# Altium PCB flatsat_2_PCB.PcbDoc (part 6 of 6)
Units mil, origin at the board's own origin, x right, y up, seen from the top; angles counter-clockwise.
Board outline 15748.03 x 9842.52 mil, 4 copper layers (Top Layer, FlatSat GND, FlatSat VCC, Bottom Layer), stack 82.765 mil thick; 155 components, 191 nets, 1391 pads, 1634 vias.
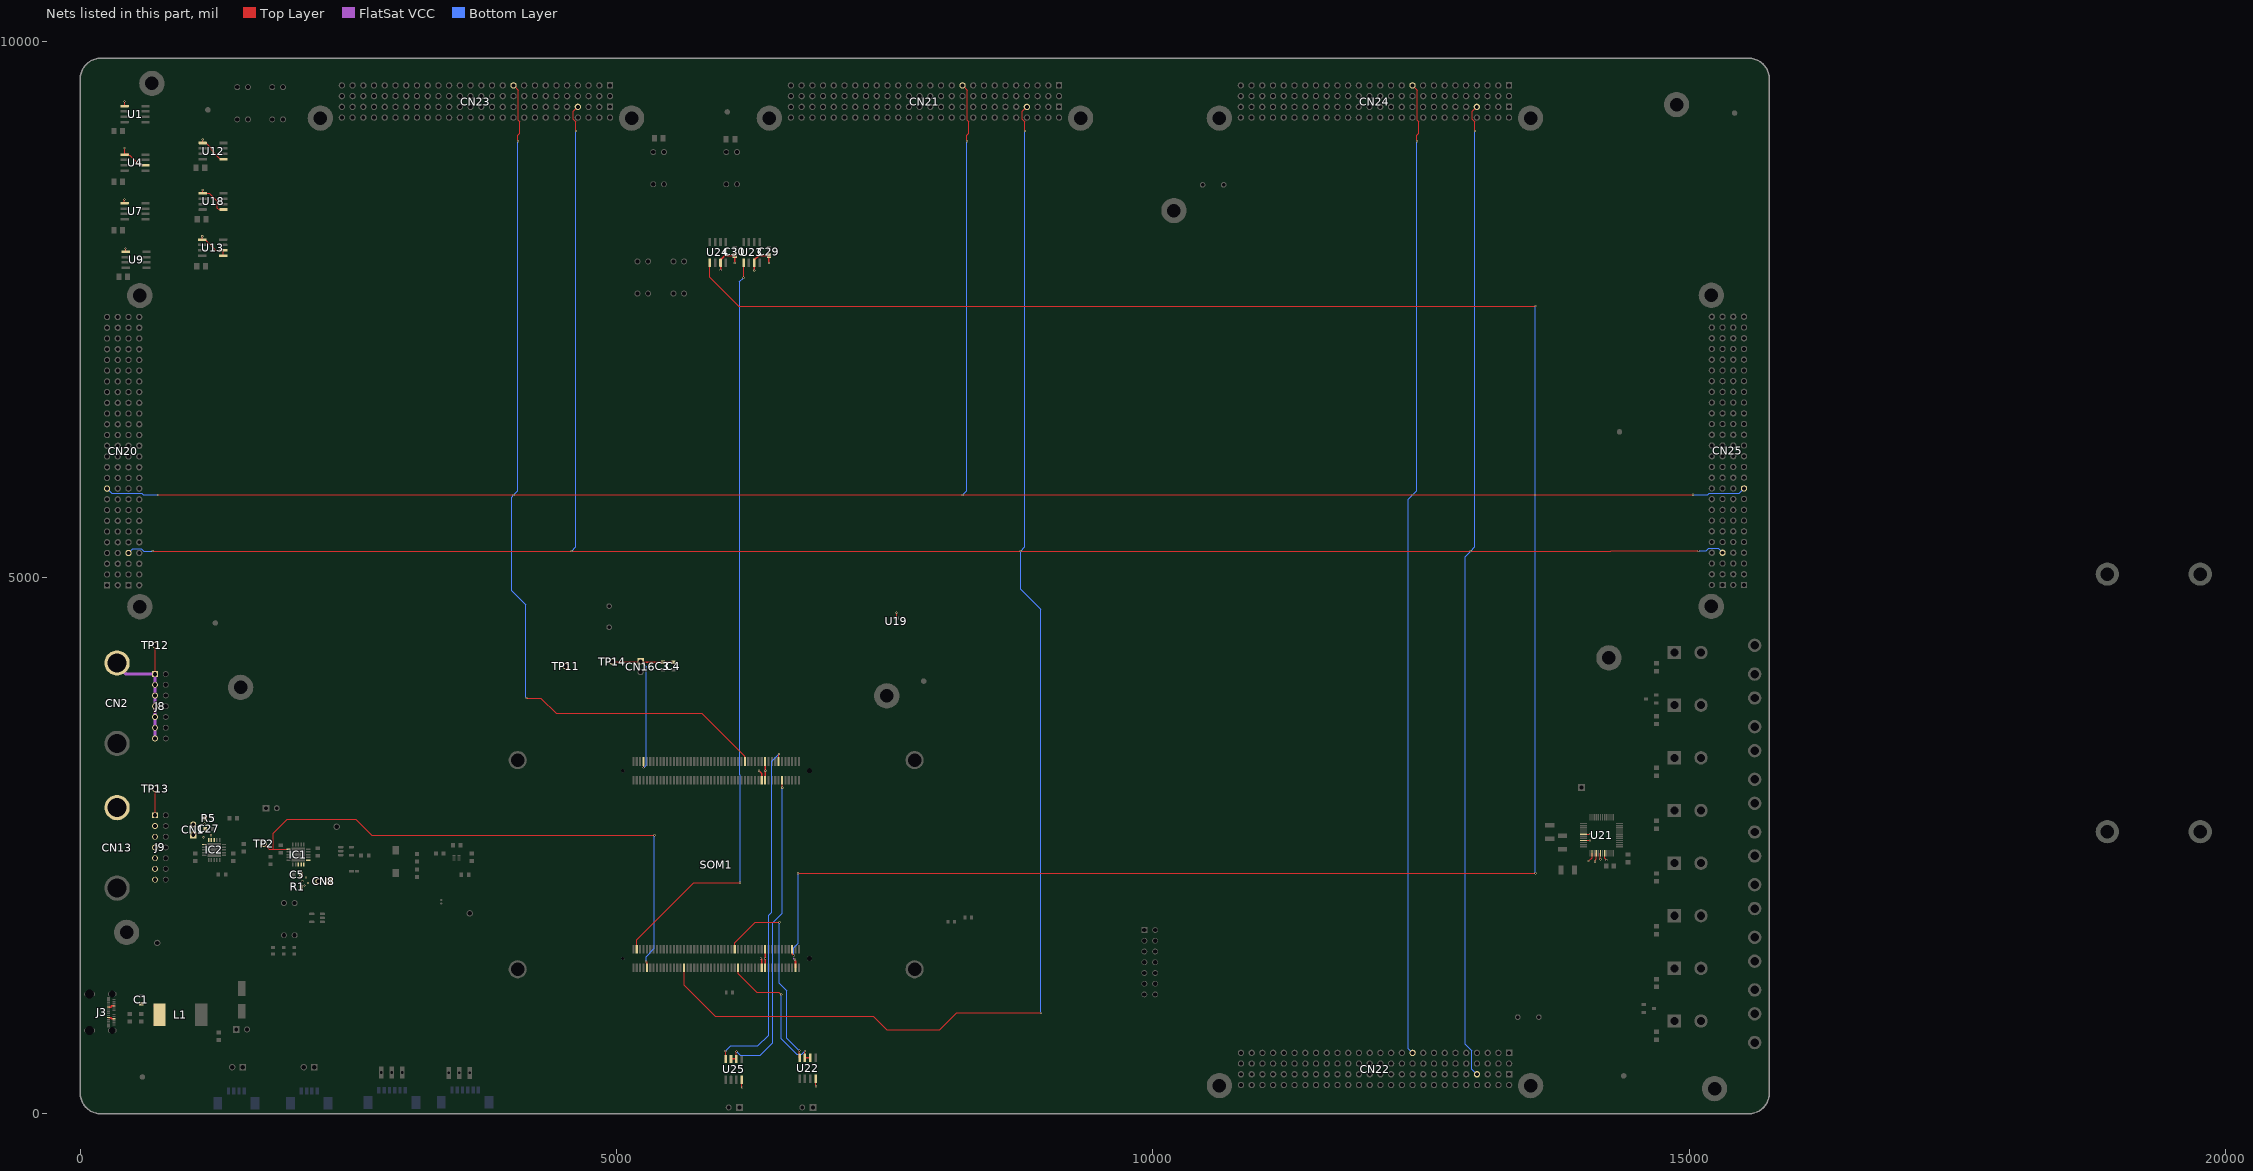
[diagram p7: the nets of this part, all layers, seen from the top]

## Via types
v1: diameter 20, hole 11.81, Top Layer to Bottom Layer, tented both sides, 872 vias
v2: diameter 30, hole 15, Top Layer to Bottom Layer, 690 vias
v3: diameter 30, hole 17.72, Top Layer to Bottom Layer, tented both sides, 72 vias

## Nets (pads, with @x,y where several pads share a name; then routed paths per layer and width w, separated by ;. In a path a pad name is that pad's centre, name@x,y a point inside that pad or via, vN(x,y) a via of type N, cw(c..) or ccw(c..) an arc to the next point about the centre after c; other vN are vias at no path point) (continued)
T/R_CHN_3: SOM1.JX2-64 U22.2 U22.3 | length 1356.4
  Top Layer w7.99: SOM1.JX2-64@6133.86,1362.2 6133.86,1307.09 6307.74,1133.21 6514.43,1133.21 v1(6535.43,1112.2)
  Top Layer w8: U22.3@6756.2,522.93 v1@6756.2,586.32
  Top Layer w15: v1(6755.91,586.61) v1@6756.2,586.32 ; U22.3@6756.2,522.93 U22.3@6756.5,522.64 U22.2@6806.5,522.64
  Bottom Layer w7.99: v1(6535.43,1112.2) 6535.43,700.79 6680.53,555.69 6724.99,555.69 v1(6755.91,586.61)
T/R_CHN_4: SOM1.JX1-90 U25.2 U25.3 | length 3002.9
  Top Layer w7.99: v1@6544.32,3042.3 SOM1.JX1-90@6544.32,3111.19
  Top Layer w8: U25.2@6117.81,513.09 v1@6117.81,582.38
  Top Layer w15: U25.3@6071.26,513.78 U25.2@6117.52,513.78 ; U25.2@6117.52,512.8 U25.2@6117.81,513.09 ; v1@6117.81,582.38 v1(6118.11,582.68) ; SOM1.JX1-90@6543.3,3112.2 SOM1.JX1-90@6544.32,3111.19 ; v1@6544.32,3042.3 v1(6545.28,3041.34)
  Bottom Layer w7.99: v1(6118.11,582.68) 6153.54,547.24 6338.58,547.24 6456.69,665.35 6456.69,1781.5 6545.28,1870.08 v1(6545.28,3041.34)
TX_CHN_1: CN20.19 CN21.19 CN22.19 CN23.19 CN24.19 CN25.19 SOM1.JX1-67 | length 36397.1
  Top Layer w8: v1(727.5,5770.61) v1(4041.9,5770.61) v1(8227.72,5770.61) v1(12422.21,5770.61) 15032.75,5770.61 v1(15034.91,5772.77) ; CN23.19@4040.16,9588.19 4083.07,9545.28 4083.07,9264.54 4098.69,9248.93 4098.69,9140.62 4081.27,9123.21 v1(4081.27,9067.1) ; v1@4159.68,3876.83 v1(4161.02,3876.83) 4296.33,3876.83 4437.08,3736.08 5793.7,3736.08 6196.85,3332.93 SOM1.JX1-67@6196.85,3285.43 ; CN21.19@8225.98,9588.19 8268.9,9545.28 8268.9,9264.54 8284.51,9248.93 8284.51,9140.62 8267.09,9123.21 v1(8267.09,9067.1) ; CN24.19@12420.47,9588.19 12463.39,9545.28 12463.39,9264.54 12479,9248.93 12479,9140.62 12461.58,9123.21 v1(12461.58,9067.1)
  Bottom Layer w8: CN20.19@251.18,5829.13 294.09,5786.22 574.83,5786.22 590.44,5770.61 v1(727.5,5770.61) ; v1(4081.27,9067.1) 4081.27,5809.98 v1(4041.9,5770.61) 4021.88,5750.58 4021.88,4875.76 4152.85,4744.78 4152.85,3885 ; v1(8227.72,5770.61) 8267.09,5809.98 v1(8267.09,9067.1) ; CN22.19@12421.59,569.42 12382.84,608.16 12382.84,1417.32 12382.84,5731.24 v1(12422.21,5770.61) 12461.58,5809.98 v1(12461.58,9067.1) ; v1(15034.91,5772.77) 15171.97,5772.77 15187.58,5788.38 15468.31,5788.38 CN25.19@15511.23,5831.3
TX_CHN_2: CN20.59 CN21.59 CN22.59 CN23.59 CN24.59 CN25.59 SOM1.JX2-32 | length 40523.9
  Top Layer w8: v1(676.59,5247.16) v1(4582.76,5247.16) v1(8768.59,5247.16) v1(12963.08,5247.16) 14267.85,5247.16 14272.68,5251.99 15075.14,5251.99 15075.51,5251.62 15083.53,5251.62 v1(15085.82,5249.32) ; v1(4622.13,9162.78) 4622.13,9247.75 4598.82,9271.07 4598.82,9346.85 CN23.59@4640.16,9388.19 ; SOM1.JX2-32@5629.92,1362.2 5629.92,1200.79 5919.15,911.55 7393.67,911.55 7520.27,784.96 8015.23,784.96 8172.71,942.44 v1(8957.38,942.44) ; v1(8807.96,9162.78) 8807.96,9247.75 8784.65,9271.07 8784.65,9346.85 CN21.59@8825.98,9388.19 ; v1(13002.45,9162.78) 13002.45,9247.75 12979.13,9271.07 12979.13,9346.85 CN24.59@13020.47,9388.19
  Bottom Layer w8: CN20.59@451.18,5229.13 492.52,5270.47 568.3,5270.47 591.62,5247.16 v1(676.59,5247.16) ; v1(4582.76,5247.16) 4622.13,5286.53 v1(4622.13,9162.78) ; v1(8807.96,9162.78) 8807.96,5286.53 v1(8768.59,5247.16) 8768.59,4892.83 8957.38,4704.03 v1(8957.38,942.44) ; v1(13002.45,9162.78) 13002.45,5286.53 v1(12963.08,5247.16) 12910.5,5194.58 12910.5,649.9 12972.44,587.96 12972.44,418.56 CN22.59@13021.59,369.42 ; v1(15085.82,5249.32) 15160.74,5249.32 15184.05,5272.63 15269.89,5272.63 CN25.59@15311.23,5231.3
TX_CHN_3: SOM1.JX2-61 U22.4 | length 1901.7
  Top Layer w7.99: SOM1.JX2-61@6102.36,1535.43 6102.36,1594.49 6295.28,1787.4 v1(6519.69,1787.4)
  Top Layer w8: U22.4@6705.61,523.52 v1@6705.61,589.67
  Top Layer w15: v1(6704.72,590.55) v1@6705.61,589.67 ; U22.4@6705.61,523.52 U22.4@6706.5,522.64
  Bottom Layer w7.99: v1(6519.69,1787.4) 6519.69,1484.6 6515.75,1480.66 6515.75,1220.47 6589.42,1146.8 6589.42,705.86 v1(6704.72,590.55)
TX_CHN_4: SOM1.JX1-87 U25.4 | length 3273.7
  Top Layer w7.99: SOM1.JX1-87@6511.81,3285.43 6511.81,3349.11 6515.75,3353.05 v1(6515.75,3356.3)
  Top Layer w8: U25.4@6016.63,513.68 v1@6016.63,585.73
  Top Layer w15: v1(6015.75,586.61) v1@6016.63,585.73 ; U25.4@6016.63,513.68 U25.4@6017.52,512.8
  Bottom Layer w7.99: v1(6015.75,586.61) 6062.99,633.86 6318.9,633.86 6417.32,732.28 6417.32,1850.39 6446.85,1879.92 6446.85,3287.4 v1(6515.75,3356.3)
TXD_CHN_1: SOM1.JX2-3 U23.1 | length 7070.1
  Top Layer w7.99: SOM1.JX2-3@5188.98,1535.43 5188.98,1625.98 5718.5,2155.51 v1(6151.57,2155.51)
  Top Layer w8: v1(6184.84,7795.28) U23.1@6184.84,7934.25
  Bottom Layer w8: v1(6151.57,2155.51) 6151.57,3160.13 6145.47,3166.23 6145.47,7755.91 v1(6184.84,7795.28)
TXD_CHN_2: SOM1.JX2-95 U24.1 | length 20959.9
  Top Layer w7.99: 5870.08,7798.03 6139.86,7528.25 9889.52,7528.25 9892.77,7531.5 v1(13566.93,7531.5) ; v1(6692.91,2244.09) v1(13566.93,2244.09)
  Top Layer w8: 5870.08,7798.03 U24.1@5870.08,7937.01
  Top Layer w15: SOM1.JX2-95@6637.8,1535.43 6640.3,1532.93 6640.3,1490.98 6653.54,1477.73 v1(6653.54,1476.38)
  Bottom Layer w7.99: v1(13566.93,2244.09) 13566.93,7505.51 v1(13566.93,7531.5)
  Bottom Layer w11: v1(6653.54,1476.38) 6653.54,1551.18 6692.91,1590.55 v1(6692.91,2244.09)
USB_VBUS: C1.1 J3.A4 J3.A9 J3.B4 J3.B9 L1.1 | length 338.2
  Top Layer w11.81: J3.B4@264.57,898.43 285.24,898.43 295.08,888.58 J3.A9@315.75,888.58 ; J3.B9@264.57,996.85 285.24,996.85 295.08,1006.69 J3.A4@318.22,1006.69 ; L1.1@688.98,824.8 740.16,875.98 L1.1@740.16,887.8 ; L1.1@692.18,1006.69 740.16,958.72 L1.1@740.16,925.2
  Top Layer w15: L1.1@690.57,1008.31 L1.1@692.18,1006.69 ; L1.1@740.16,887.8 L1.1@740.16,925.2
V1_E: CN2.1 J8.1 J8.3 J8.5 J8.7 J8.9 J8.11 J8.13 TP12.1 | length 1286.4
  Top Layer w8: J8.1@698.2,4100.21 698.2,4369.46 TP12.1@698.82,4370.08
  FlatSat VCC w30: CN2.1@324.8,4203.74 428.33,4100.21 J8.1@698.2,4100.21 J8.3@698.2,4000.21 J8.5@698.2,3900.21 J8.7@698.2,3800.21 J8.9@698.2,3700.21 J8.11@698.2,3600.21 J8.13@698.2,3500.21
V2_E: CN13.1 J9.1 J9.3 J9.5 J9.7 J9.9 J9.11 J9.13 TP13.1 | length 287.6
  Top Layer w8: J9.1@698.2,2784.25 698.2,3001.28 ; TP13.1@698.82,3021.59 TP13.1@698.82,3031.5
  FlatSat VCC w30: CN13.1@334.65,2855.31 CN13.1@344.49,2855.31 CN13.1@395.29,2855.31
VBAT: C3.1 C4.1 CN16.1 SOM1.JX1-7 TP14.1 | length 1654.1
  Top Layer w8: TP14.1@4960.63,4215.35 5221.1,4215.35 CN16.1@5224.53,4218.78 ; v1(5251.97,3228.45) SOM1.JX1-7@5251.97,3285.43
  Top Layer w15: CN16.1@5224.53,4218.78 5233.11,4210.2 C3.1@5433.07,4210.2 C4.1@5531.5,4210.2
  Bottom Layer w8: CN16.1@5224.53,4218.78 5275.59,4167.72 5275.59,3252.07 v1(5251.97,3228.45)
VCCIO: C5.1 CN8.1 CN8.2 IC1.1 IC1.18 IC1.19 IC1.20 R1.1 SOM1.JX1-78 SOM1.JX1-79 SOM1.JX1-80 SOM1.JX2-78 SOM1.JX2-79 SOM1.JX2-80 SOM1.JX2-98 | length 702.5
  Top Layer w15: C5.1@2049.76,2231.3 2049.76,2233.27 C5.1@2060.04,2243.54 ; R1.1@2059.61,2118.44 R1.1@2065.54,2112.51 ; C5.1@2059.61,2231.3 2065.54,2225.37 2065.54,2223.4 C5.1@2069.82,2219.11 ; v1(6328.21,3199.35) 6354.33,3173.23 SOM1.JX1-78@6354.33,3112.2 ; v1(6345.98,1449.29) 6354.33,1440.95 SOM1.JX2-78@6354.33,1362.2 ; SOM1.JX2-80@6385.82,1362.2 v1(6385.83,1449.29) SOM1.JX2-79@6385.83,1535.43 ; SOM1.JX1-80@6385.82,3112.2 6385.83,3195.5 6387.8,3197.47 v1(6387.8,3198.82) 6387.8,3200.17 6385.83,3202.14 SOM1.JX1-79@6385.83,3285.43 ; v1(6663.39,1437.01) 6663.39,1435.65 6669.29,1429.75 SOM1.JX2-98@6669.29,1362.2
  FlatSat VCC w15: v1(6328.21,3199.35) v1@6328.48,3199.08 ; v1@6387.53,3199.08 v1(6387.8,3198.82) ; 6651.1,1449.29 v1@6662.43,1437.96
  FlatSat VCC w19.68: CN8.1@2321.65,2169.29 CN8.1@2343.31,2190.94
  other v1: 2090.28,2131.16 2124.75,2153.27 2073.21,2169.97 2106.3,2204.72
VCCIO_EN: IC1.11 SOM1.JX2-10 TP2.1 | length 5339.1
  Top Layer w7.99: TP2.1@1712.6,2519.68 1762.8,2469.49 1801.18,2469.49 ; IC1.11@1941.93,2469.49 1801.18,2469.49 ; v1(5354.33,2598.43) 2716.54,2598.43 2568.9,2746.06 1929.13,2746.06 1801.18,2618.11 1801.18,2469.49
  Top Layer w8: SOM1.JX2-10@5280.28,1365.39 5280.96,1364.7 SOM1.JX2-10@5283.46,1362.2
  Top Layer w15: v1(5275.59,1419.7) 5275.59,1418.34 5280.96,1412.97 SOM1.JX2-10@5280.96,1364.7
  Bottom Layer w7.99: v1(5275.59,1419.7) 5275.59,1466.54 5354.33,1545.28 v1(5354.33,2598.43)
VS: C27.1 C29.1 C30.1 CN1.1 CN1.2 IC2.1 IC2.18 IC2.19 IC2.20 R5.1 TP11.1 U1.5 U4.2 U4.5 U7.5 U9.5 U12.1 U12.5 U13.1 U13.2 U13.5 U18.1 U18.5 U19.5 U21.2 U21.4 U21.6 U21.8 U21.42 U21.45 U22.8 U23.3 U24.3 U25.8 | length 2546.7
  Top Layer w8: U7.5@413.39,8494.09 v1(413.39,8525.49) ; v1(414.57,9004.04) 414.57,8950.92 414.9,8950.59 449.02,8950.59 449.02,8939.49 449.35,8939.16 460.45,8939.16 556.5,8843.11 U4.2@609.06,8843.11 ; U1.5@414.57,9395.87 v1(414.57,9438.19) ; U9.5@424.41,8037.6 v1(424.41,8069) ; v1(1138.48,8182.58) U13.5@1138.48,8151.18 1165.45,8151.18 1265.45,8051.18 U13.2@1332.97,8051.18 U13.1@1332.97,8001.18 ; v1(1142.91,8612.7) U18.5@1142.91,8581.3 1204.53,8581.3 1279.53,8506.3 1279.53,8444.88 1291.31,8433.1 1335.6,8433.1 U18.1@1337.4,8431.3 ; v1(1142.91,9082.78) U12.5@1142.91,9051.38 1169.88,9051.38 1220.47,9000.79 1220.47,8986.22 1297.5,8909.19 1329.59,8909.19 U12.1@1337.4,8901.38 ; v1@5969.88,7871.95 5974.41,7867.42 v1@5974.41,7864.17 ; U24.3@5969.88,7934.25 U24.3@5969.88,7961.22 ; v1(6171.26,248.03) 6169.39,249.9 6169.39,317.03 U25.8@6171.26,318.9 ; v1@6284.84,7871.95 6289.37,7867.42 v1@6289.37,7864.17 ; U22.8@6856.5,327.76 6858.37,325.89 6858.37,259.74 v1(6860.24,257.87) ; U19.5@7610.9,4624.09 7610.9,4671.5 v1(7611.56,4672.16) ; U21.45@14015.75,2549.21 v1(14074.8,2549.21) ; U21.42@14015.75,2608.27 v1(14074.8,2608.27) ; v1(14062.99,2358.27) 14094.49,2389.76 U21.2@14094.49,2431.1 ; v1(14122.05,2350.39) 14122.05,2366.14 14133.86,2377.95 U21.4@14133.86,2431.1 ; v1(14173.23,2373.61) U21.6@14173.23,2431.1 ; U21.8@14212.6,2431.1 14212.6,2381.89 v1(14228.35,2366.14)
  Top Layer w11.81: v1@5969.82,7873.87 U24.3@5969.82,7936.18 ; U24.3@5969.88,7961.22 6010.63,8001.97 C30.1@6102.36,8001.97 v1@6102.36,7939.66 ; v1@6284.84,7871.95 U23.3@6284.84,7934.25 ; U23.3@6284.84,7961.22 6325.59,8001.97 C29.1@6417.32,8001.97 ; v1@6421.06,7940.11 C29.1@6421.06,8002.42
  other v1: 1151.57,2578.74 1220.47,2598.43 1161.42,2706.69 6284.84,7864.17 5969.82,7866.1 6102.36,7931.89 6421.06,7932.34
pads on no net: CN3.0 CN4.0 CN5.0 CN6.0 D1.3 FD1.FD0 FD2.FD0 FD3.FD0 FD4.FD0 FD5.FD0 FD6.FD0 FD7.FD0 FD8.FD0 J3.1 J3.2 J3.3 J3.4 J3.A2 J3.A3 J3.A6 J3.A7 J3.A8 J3.A10 J3.A11 J3.B2 J3.B3 J3.B6 J3.B7 J3.B8 J3.B10 J3.B11 J5.3 J6.3 J10.3 J11.3 J12.3 J13.3 J14.3 J15.3 M1.0 M2.0 M3.0 M4.0 MEC1.0 MEC2.0 MEC3.0 MEC4.0 MEC5.0 MEC6.0 MEC7.0 MEC8.0 SOM1.0 SOM1.JX1-1 SOM1.JX1-2 SOM1.JX1-3 SOM1.JX1-4 SOM1.JX1-6 SOM1.JX1-8 SOM1.JX1-9 SOM1.JX1-10 SOM1.JX1-89 SOM1.JX1-91 SOM1.JX1-92 SOM1.JX1-93 SOM1.JX1-94 SOM1.JX2-5 SOM1.JX2-6 SOM1.JX2-9 SOM1.JX2-13 SOM1.JX2-14 SOM1.JX2-94 SOM1.JX2-96 SOM1.JX2-99 SOM1.JX2-100 U19.3 U21.10 U23.5 U23.8 U24.5 U24.8
copper on no net: | length 0

## Polygon pours and split planes (outlines as drawn)
VS on FlatSat VCC "VS_L03_P059" (solid, remove dead copper, pour order 59): 0,9645.67 cw(c196.85,9645.67) 196.85,9842.52 15551.18,9842.52 cw(c15551.18,9645.67) 15748.03,9645.67 15748.03,196.85 cw(c15551.18,196.85) 15551.18,0 196.85,0 cw(c196.85,196.85) 0,196.85
VCCIO on FlatSat VCC "VCCIO_L03_P010" (solid, pour order 10): 2066.93,2224.41 3574.8,2224.41 4909.45,3559.06 6771.65,3559.06 6984.36,3346.35 6984.36,1385.93 6949.13,1350.71 6267.72,1350.71 6267.72,3137.8 6098.43,3307.09 5007.87,3307.09 3559.06,1858.27 2326.77,1858.27 2047.24,2137.8 2047.24,2204.72
+5V on FlatSat VCC "+5V_L03_P029" (solid, pour order 29): 196.85,11.81 cw(c196.85,208.66) 0,208.66 0,1783.46 1066.93,1783.46 1066.93,2381.89 1272.68,2587.64 4292.36,2587.64 5015.75,3311.02 6094.49,3311.02 6267.72,3137.8 6267.72,1350.39 4929.13,11.81
V2_E on FlatSat VCC "V2_E_L03_P009" (solid, pour order 9): 118.11,3089.57 118.11,2664.34 648.2,2134.25 748.2,2134.25 748.2,3086.78 751.97,3090.55
GND on FlatSat GND "GND_L02_P008" (solid, pour order 8): 15551.18,0 ccw(c15551.18,196.85) 15748.03,196.85 15748.03,9645.67 ccw(c15551.18,9645.67) 15551.18,9842.52 196.85,9842.52 ccw(c196.85,9645.67) 0,9645.67 0,196.85 ccw(c196.85,196.85) 196.85,0
PC104_GND on FlatSat GND "PC104_GND_L02_P007" (solid, pour order 7): 103.55,4728.66 10620.02,4728.66 10620.02,87.53 13520.94,87.53 13520.94,4728.66 15669.29,4728.66 15669.29,7629.59 13520.94,7629.59 13520.94,9735.82 10620.02,9735.82 10620.02,7629.59 9326.46,7629.59 9326.46,9735.82 6425.53,9735.82 6425.53,7629.59 5140.63,7629.59 5140.63,9735.82 2239.7,9735.82 2239.7,7629.59 103.73,7629.59 103.55,7629.41
GND on Top Layer "GND_L01_P060" (solid, remove dead copper, pour order 60): 15551.18,9842.52 cw(c15551.18,9645.67) 15748.03,9645.67 15748.03,196.85 cw(c15551.18,196.85) 15551.18,0 196.85,0 cw(c196.85,196.85) 0,196.85 0,9645.67 cw(c196.85,9645.67) 196.85,9842.52
+5V on Top Layer "+5V_L01_P012" (solid, pour order 12): 3503.94,2535.43 3503.94,2397.64 3358.27,2397.64 3362.2,2401.57 3362.2,2464.57 3433.07,2535.43
+5V on Top Layer "+5V_L01_P057" (solid, pour order 57): 2024.61,2487.2 2024.61,2568.9 1995.08,2568.9 1995.08,2526.57 1995.08,2487.2 1965.55,2487.2 1916.34,2487.2 1850.39,2487.2 1850.39,2588.58 1879.92,2618.11 2214.57,2618.11 2244.87,2587.8 2244.87,2457.68 2153.66,2457.68 2103.35,2457.68 2103.35,2487.2
+5V on Top Layer "+5V_L01_P054" (solid, pour order 54): 1072.83,1043.31 1072.83,738.19 1598.43,738.19 1683.07,822.83 1683.07,964.57 1604.33,1043.31
VS on Top Layer "VS_L01_P053" (solid, pour order 53): 1015.75,2500 1181.1,2500 1181.1,2529.53 1259.84,2529.53 1259.84,2598.43 1240.16,2618.11 1220.47,2618.11 1190.94,2618.11 1190.94,2785.43 1015.75,2785.43
VCCIO on Top Layer "VCCIO_L01_P049" (solid, pour order 49): 2145.67,2372.05 2145.67,2096.46 2141.73,2092.52 2027.56,2092.52 2027.56,2342.52 2096.46,2342.52 2106.3,2352.36 2106.3,2372.05
+5V on Top Layer "Top Layer-+5V" (solid, pour order 48): 1043.5,2302.96 1072.83,2273.62 1334.65,2273.62 1334.65,2204.72 1381.89,2204.72 1381.89,2259.84 1458.66,2336.61 1458.66,2381.89 1368.11,2381.89 1368.11,2421.26 1318.9,2421.26 1318.9,2391.73 1289.37,2391.73 1289.37,2342.52 1259.84,2342.52 1259.84,2391.73 1181.1,2391.73 1181.1,2421.26 1131.89,2421.26 1131.89,2381.89 1043.5,2381.89
USB_VBUS on Top Layer "Top Layer-USB_VBUS" (solid, pour order 44): 305.12,881.89 338.58,881.89 472.44,748.03 757.87,748.03 797.24,787.4 797.24,1033.46 777.56,1053.15 379.92,1053.15 340.55,1013.78 295.28,1013.78 295.28,1000 525.59,1000 561.02,964.57 649.61,964.57 669.29,944.88 669.29,846.46 639.76,816.93 442.91,816.93 364.17,895.67 305.12,895.67
VCCIO on Top Layer "VCCIO_L01_P043" (solid, pour order 43): 2039.37,2255.91 2039.37,2094.49 2110.24,2094.49 2153.54,2137.8 2153.54,2200.79 2098.43,2255.91 2043.31,2255.91
FB_VCCIO on Top Layer "Top Layer-FB_VCCIO" (solid, pour order 30): 2192.91,1905.51 2196.85,1901.57 2196.85,1769.69 2287.8,1769.69 2289.95,1783.56 2283.99,1804.99 2230.97,1804.99 2228.35,1905.51 2228.35,1925.2 2141.73,2011.81 2047.24,2011.81 2011.81,2047.24 2011.81,2133.86 1948.82,2196.85 1948.82,2259.84 1992.13,2303.15 1992.13,2346.46 1972.44,2346.46 1866.14,2240.16 1866.14,2011.81 1759.84,1905.51 1759.84,1547.24 1775.59,1531.5 1822.83,1531.5 1846.46,1555.12 1846.46,1700.79 2051.18,1905.51
NetD1_4 on Top Layer "NETD1_4_L01_P028" (solid, pour order 28): 2196.85,1893.7 2196.85,1826.77 2090.55,1826.77 1940.94,1677.17 1940.94,1551.18 1921.26,1531.5 1874.02,1531.5 1858.27,1547.24 1858.27,1692.91 2059.06,1893.7
NetD1_5 on Top Layer "NETD1_5_L01_P024" (solid, pour order 24): 1956.69,1551.18 1956.69,1677.17 2093.73,1814.2 2196.71,1814.2 2196.71,1688.83 2039.37,1531.5 1976.38,1531.5
GND on Bottom Layer "GND_L04_P058" (solid, pour order 58): 196.85,0 cw(c196.85,196.85) 0,196.85 0,9645.67 cw(c196.85,9645.67) 196.85,9842.52 15551.18,9842.52 cw(c15551.18,9645.67) 15748.03,9645.67 15748.03,196.85 cw(c15551.18,196.85) 15551.18,0

## Keep-outs
Keep-Out Layer:
  the board outline again, w10

## Silkscreen, mask and mechanical layers (free items; w line width, h text height)
Top Overlay:
  drawing of 1068 lines, arcs and shapes, not listed
  text "L1" at 1456.69,9675.2 h60 r90
  text "H1" at 1633.86,9675.2 h60 r90
  text "H2" at 1781.5,9675.2 h60 r90
  text "L2" at 1958.66,9675.2 h60 r90
  text "CAN" at 2057.09,9488.19 h60 r90
  text "GND" at 2057.09,9183.07 h60 r90
  text "CAN1" at 5295.28,9163.39 h60
  text "CAN2" at 5954.72,9163.39 h60
  text "NO RES" at 5541.34,8986.22 h60 r270
  text "NO RES" at 6220.47,8986.22 h60 r270
  text "ON" at 5688.98,8946.85 h60
  text "RES" at 5187.01,8897.64 h60 r270
  text "RES" at 5867.72,8897.64 h60 r270
  text "POWER SENSING" at 1584.65,8828.74 h60 r270
  text "Slot 2" at 2382.32,8813.93 h118.11
  text "Slot 3" at 6568.14,8813.93 h118.11
  text "Slot 4" at 10762.63,8813.93 h118.11
  text "OFF" at 5669.29,8631.89 h60
  text "TERMINATION RESISTOR" at 5157.48,8494.09 h60
  text "FlatSat Platform 2 / v0.1" at 11377.95,8267.72 h47.24
  text "SpaceLab UFSC  2021" at 11337.92,8163.43 h47.24
  text "CAN1" at 5147.64,8149.61 h60
  text "CAN2" at 5452.76,8149.61 h60
  text "ON" at 4901.57,7923.23 h60
  text "OFF" at 4881.89,7608.27 h60
  text "Slot 5" at 14736.97,7489.14 h118.11 r270
  text "L1" at 5521.65,7480.31 h60 r90
  text "H1" at 5708.66,7480.31 h60 r90
  text "H2" at 5187.01,7460.63 h60 r90
  text "L2" at 5364.17,7460.63 h60 r90
  text "BREAK CAN LINE" at 4990.16,7362.2 h60
  text "WARNING: Inverted PC104 pinout" at 1259.84,5025.53 h169.29 r90
  text "Slot 1" at 1104.18,4883.26 h118.11 r90
  text "Table of non-configurable PC104 pins" at 11160.84,4787.1 h118.11
  text "+" at 2167.99,4783.47 h60
  text "H" at 10962.94,4605.97 h88.77
  text "1" at 11020.58,4605.97 h88.77
  text "F" at 11343.03,4605.97 h88.77
  text "U" at 11392.49,4605.97 h88.77
  text "N" at 11450.12,4605.97 h88.77
  text "C" at 11507.75,4605.97 h88.77
  text "T" at 11565.78,4605.97 h88.77
  text "I" at 11615.23,4605.97 h88.77
  text "O" at 11639.77,4605.97 h88.77
  text "N" at 11697.4,4605.97 h88.77
  text "H" at 12039.06,4605.97 h88.77
  text "2" at 12096.7,4605.97 h88.77
  text "F" at 12419.15,4605.97 h88.77
  text "U" at 12468.6,4605.97 h88.77
  text "N" at 12526.24,4605.97 h88.77
  text "C" at 12583.87,4605.97 h88.77
  text "T" at 12641.9,4605.97 h88.77
  text "I" at 12691.35,4605.97 h88.77
  text "O" at 12715.89,4605.97 h88.77
  text "N" at 12773.52,4605.97 h88.77
  text "VCCB" at 2037.24,4498.19 h60 r90
  text "1" at 10992.06,4431.12 h88.77
  text "C" at 11288.73,4431.12 h88.77
  text "A" at 11346.37,4431.12 h88.77
  text "N" at 11404,4431.12 h88.77
  text "L" at 11462.02,4431.12 h88.77
  text "_" at 11511.48,4431.12 h88.77
  text "C" at 11552.37,4431.12 h88.77
  text "H" at 11610.39,4431.12 h88.77
  text "N" at 11668.03,4431.12 h88.77
  text "_" at 11725.66,4431.12 h88.77
  text "1" at 11766.94,4431.12 h88.77
  text "2" at 12068.18,4431.12 h88.77
  text "C" at 12364.85,4431.12 h88.77
  text "A" at 12422.48,4431.12 h88.77
  text "N" at 12480.12,4431.12 h88.77
  text "L" at 12538.14,4431.12 h88.77
  text "_" at 12587.6,4431.12 h88.77
  text "C" at 12628.49,4431.12 h88.77
  text "H" at 12686.51,4431.12 h88.77
  text "N" at 12744.15,4431.12 h88.77
  text "_" at 12801.78,4431.12 h88.77
  text "2" at 12843.06,4431.12 h88.77
  text "-" at 2218.17,4408.83 h60 r90
  text "+" at 5199.61,4384.14 h60
  text "Ambient temperature  / sensor" at 7431.1,4340.55 h19.68
  text "INTERFACE BOARD" at 19698.98,4273.46 h60 r270
  text "3" at 10992.06,4256.27 h88.77
  text "C" at 11284.4,4256.27 h88.77
  text "A" at 11342.04,4256.27 h88.77
  text "N" at 11399.67,4256.27 h88.77
  text "H" at 11457.7,4256.27 h88.77
  text "_" at 11515.33,4256.27 h88.77
  text "C" at 11556.61,4256.27 h88.77
  text "H" at 11614.24,4256.27 h88.77
  text "N" at 11671.88,4256.27 h88.77
  text "_" at 11729.51,4256.27 h88.77
  text "1" at 11770.79,4256.27 h88.77
  text "6" at 12068.18,4256.27 h88.77
  text "C" at 12360.52,4256.27 h88.77
  text "A" at 12418.16,4256.27 h88.77
  text "N" at 12475.79,4256.27 h88.77
  text "H" at 12533.82,4256.27 h88.77
  text "_" at 12591.45,4256.27 h88.77
  text "C" at 12632.73,4256.27 h88.77
  text "H" at 12690.36,4256.27 h88.77
  text "N" at 12748,4256.27 h88.77
  text "_" at 12805.63,4256.27 h88.77
  text "2" at 12846.91,4256.27 h88.77
  text "+" at 39.54,4183.07 h60
  text "+" at 679.3,4163.39 h60
  text "-" at 777.73,4163.39 h60
  text "2" at 10971.21,4081.42 h88.77
  text "9" at 11012.49,4081.42 h88.77
  text "G" at 11463.43,4081.42 h88.77
  text "N" at 11521.06,4081.42 h88.77
  text "D" at 11578.7,4081.42 h88.77
  text "2" at 12047.33,4081.42 h88.77
  text "5" at 12088.6,4081.42 h88.77
  text "P" at 12298.36,4081.42 h88.77
  text "A" at 12347.81,4081.42 h88.77
  text "Y" at 12405.45,4081.42 h88.77
  text "L" at 12463.08,4081.42 h88.77
  text "O" at 12512.54,4081.42 h88.77
  text "A" at 12570.56,4081.42 h88.77
  text "D" at 12628.2,4081.42 h88.77
  text "S" at 12685.83,4081.42 h88.77
  text "_" at 12735.29,4081.42 h88.77
  text "V" at 12776.57,4081.42 h88.77
  text "C" at 12834.2,4081.42 h88.77
  text "C" at 12891.83,4081.42 h88.77
  text "VBAT" at 5108.11,4057.24 h60 r90
  text "-" at 5249.78,3962.26 h60 r90
  text "3" at 10971.21,3906.57 h88.77
  text "0" at 11012.49,3906.57 h88.77
  text "G" at 11463.43,3906.57 h88.77
  text "N" at 11521.06,3906.57 h88.77
  text "D" at 11578.7,3906.57 h88.77
  text "2" at 12047.33,3906.57 h88.77
  text "6" at 12088.6,3906.57 h88.77
  text "P" at 12298.36,3906.57 h88.77
  text "A" at 12347.81,3906.57 h88.77
  text "Y" at 12405.45,3906.57 h88.77
  text "L" at 12463.08,3906.57 h88.77
  text "O" at 12512.54,3906.57 h88.77
  text "A" at 12570.56,3906.57 h88.77
  text "D" at 12628.2,3906.57 h88.77
  text "S" at 12685.83,3906.57 h88.77
  text "_" at 12735.29,3906.57 h88.77
  text "V" at 12776.57,3906.57 h88.77
  text "C" at 12834.2,3906.57 h88.77
  text "C" at 12891.83,3906.57 h88.77
  text "3" at 10971.21,3731.72 h88.77
  text "1" at 11012.49,3731.72 h88.77
  text "G" at 11463.43,3731.72 h88.77
  text "N" at 11521.06,3731.72 h88.77
  text "D" at 11578.7,3731.72 h88.77
  text "2" at 12047.33,3731.72 h88.77
  text "7" at 12088.6,3731.72 h88.77
  text "E" at 12356.59,3731.72 h88.77
  text "P" at 12406.04,3731.72 h88.77
  text "S" at 12455.5,3731.72 h88.77
  text "_" at 12504.96,3731.72 h88.77
  text "B" at 12546.24,3731.72 h88.77
  text "E" at 12603.87,3731.72 h88.77
  text "_" at 12653.33,3731.72 h88.77
  text "V" at 12694.61,3731.72 h88.77
  text "C" at 12752.24,3731.72 h88.77
  text "C" at 12809.88,3731.72 h88.77
  text "EXT V1" at 98.27,3662.73 h60 r90
  text "3" at 10971.21,3556.87 h88.77
  text "2" at 11012.49,3556.87 h88.77
  text "G" at 11463.43,3556.87 h88.77
  text "N" at 11521.06,3556.87 h88.77
  text "D" at 11578.7,3556.87 h88.77
  text "2" at 12047.33,3556.87 h88.77
  text "8" at 12088.6,3556.87 h88.77
  text "E" at 12356.59,3556.87 h88.77
  text "P" at 12406.04,3556.87 h88.77
  text "S" at 12455.5,3556.87 h88.77
  text "_" at 12504.96,3556.87 h88.77
  text "B" at 12546.24,3556.87 h88.77
  text "E" at 12603.87,3556.87 h88.77
  text "_" at 12653.33,3556.87 h88.77
  text "V" at 12694.61,3556.87 h88.77
  text "C" at 12752.24,3556.87 h88.77
  text "C" at 12809.88,3556.87 h88.77
  text "-" at 39.54,3444.88 h60
  text "4" at 10971.21,3382.02 h88.77
  text "1" at 11012.49,3382.02 h88.77
  text "S" at 11317.85,3382.02 h88.77
  text "D" at 11367.3,3382.02 h88.77
  text "A" at 11424.94,3382.02 h88.77
  text "_" at 11482.57,3382.02 h88.77
  text "C" at 11523.85,3382.02 h88.77
  text "H" at 11581.49,3382.02 h88.77
  text "N" at 11639.51,3382.02 h88.77
  text "_" at 11697.14,3382.02 h88.77
  text "1" at 11738.42,3382.02 h88.77
  text "2" at 12047.33,3382.02 h88.77
  text "9" at 12088.6,3382.02 h88.77
  text "G" at 12539.55,3382.02 h88.77
  text "N" at 12597.18,3382.02 h88.77
  text "D" at 12654.82,3382.02 h88.77
  text "+" at 679.3,3375.99 h60
  text "-" at 777.73,3375.98 h60
  text "4" at 10971.21,3207.17 h88.77
  text "3" at 11012.49,3207.17 h88.77
  text "S" at 11322.18,3207.17 h88.77
  text "C" at 11371.63,3207.17 h88.77
  text "L" at 11429.27,3207.17 h88.77
  text "_" at 11478.72,3207.17 h88.77
  text "C" at 11520,3207.17 h88.77
  text "H" at 11577.64,3207.17 h88.77
  text "N" at 11635.27,3207.17 h88.77
  text "_" at 11693.29,3207.17 h88.77
  text "1" at 11734.18,3207.17 h88.77
  text "3" at 12047.33,3207.17 h88.77
  text "0" at 12088.6,3207.17 h88.77
  text "G" at 12539.55,3207.17 h88.77
  text "N" at 12597.18,3207.17 h88.77
  text "D" at 12654.82,3207.17 h88.77
  text "4" at 10971.21,3032.32 h88.77
  text "5" at 11012.49,3032.32 h88.77
  text "O" at 11326.11,3032.32 h88.77
  text "B" at 11383.74,3032.32 h88.77
  text "D" at 11441.38,3032.32 h88.77
  text "H" at 11499.4,3032.32 h88.77
  text "_" at 11557.04,3032.32 h88.77
  text "V" at 11598.32,3032.32 h88.77
  text "C" at 11655.95,3032.32 h88.77
  text "C" at 11713.58,3032.32 h88.77
  text "3" at 12047.33,3032.32 h88.77
  text "1" at 12088.6,3032.32 h88.77
  text "G" at 12539.55,3032.32 h88.77
  text "N" at 12597.18,3032.32 h88.77
  text "D" at 12654.82,3032.32 h88.77
  text "4" at 10971.21,2857.47 h88.77
  text "6" at 11012.49,2857.47 h88.77
  text "O" at 11326.11,2857.47 h88.77
  text "B" at 11383.74,2857.47 h88.77
  text "D" at 11441.38,2857.47 h88.77
  text "H" at 11499.4,2857.47 h88.77
  text "_" at 11557.04,2857.47 h88.77
  text "V" at 11598.32,2857.47 h88.77
  text "C" at 11655.95,2857.47 h88.77
  text "C" at 11713.58,2857.47 h88.77
  text "3" at 12047.33,2857.47 h88.77
  text "2" at 12088.6,2857.47 h88.77
  text "G" at 12539.55,2857.47 h88.77
  text "N" at 12597.18,2857.47 h88.77
  text "D" at 12654.82,2857.47 h88.77
  text "+" at 679.3,2844.49 h60
  text "-" at 777.73,2844.49 h60
  text "+" at 39.54,2805.12 h60
  text "4" at 10971.21,2682.62 h88.77
  text "7" at 11012.49,2682.62 h88.77
  text "E" at 11359.55,2682.62 h88.77
  text "D" at 11409.01,2682.62 h88.77
  text "C" at 11466.65,2682.62 h88.77
  text "_" at 11524.28,2682.62 h88.77
  text "V" at 11565.56,2682.62 h88.77
  text "C" at 11623.19,2682.62 h88.77
  text "C" at 11681.22,2682.62 h88.77
  text "3" at 12047.33,2682.62 h88.77
  text "5" at 12088.6,2682.62 h88.77
  text "A" at 12435.67,2682.62 h88.77
  text "N" at 12493.31,2682.62 h88.77
  text "T" at 12550.94,2682.62 h88.77
  text "_" at 12600.4,2682.62 h88.77
  text "V" at 12641.68,2682.62 h88.77
  text "C" at 12699.31,2682.62 h88.77
  text "C" at 12757.34,2682.62 h88.77
  text "4" at 10971.21,2507.77 h88.77
  text "8" at 11012.49,2507.77 h88.77
  text "E" at 11359.55,2507.77 h88.77
  text "D" at 11409.01,2507.77 h88.77
  text "C" at 11466.65,2507.77 h88.77
  text "_" at 11524.28,2507.77 h88.77
  text "V" at 11565.56,2507.77 h88.77
  text "C" at 11623.19,2507.77 h88.77
  text "C" at 11681.22,2507.77 h88.77
  text "3" at 12047.33,2507.77 h88.77
  text "6" at 12088.6,2507.77 h88.77
  text "A" at 12435.67,2507.77 h88.77
  text "N" at 12493.31,2507.77 h88.77
  text "T" at 12550.94,2507.77 h88.77
  text "_" at 12600.4,2507.77 h88.77
  text "V" at 12641.68,2507.77 h88.77
  text "C" at 12699.31,2507.77 h88.77
  text "C" at 12757.34,2507.77 h88.77
  text "4" at 10971.21,2332.91 h88.77
  text "9" at 11012.49,2332.91 h88.77
  text "R" at 11384.34,2332.91 h88.77
  text "D" at 11441.98,2332.91 h88.77
  text "_" at 11499.61,2332.91 h88.77
  text "V" at 11540.89,2332.91 h88.77
  text "C" at 11598.52,2332.91 h88.77
  text "C" at 11656.55,2332.91 h88.77
  text "4" at 12047.33,2332.91 h88.77
  text "5" at 12088.6,2332.91 h88.77
  text "B" at 12435.67,2332.91 h88.77
  text "A" at 12493.31,2332.91 h88.77
  text "T" at 12550.94,2332.91 h88.77
  text "_" at 12600.4,2332.91 h88.77
  text "V" at 12641.68,2332.91 h88.77
  text "C" at 12699.31,2332.91 h88.77
  text "C" at 12757.34,2332.91 h88.77
  text "EXT V2" at 98.27,2314.31 h60 r90
  text "5" at 10971.21,2158.06 h88.77
  text "0" at 11012.49,2158.06 h88.77
  text "R" at 11384.34,2158.06 h88.77
  text "D" at 11441.98,2158.06 h88.77
  text "_" at 11499.61,2158.06 h88.77
  text "V" at 11540.89,2158.06 h88.77
  text "C" at 11598.52,2158.06 h88.77
  text "C" at 11656.55,2158.06 h88.77
  text "4" at 12047.33,2158.06 h88.77
  text "6" at 12088.6,2158.06 h88.77
  text "B" at 12435.67,2158.06 h88.77
  text "A" at 12493.31,2158.06 h88.77
  text "T" at 12550.94,2158.06 h88.77
  text "_" at 12600.4,2158.06 h88.77
  text "V" at 12641.68,2158.06 h88.77
  text "C" at 12699.31,2158.06 h88.77
  text "C" at 12757.34,2158.06 h88.77
  text "REG_RST" at 2917.92,2145.51 h60 r270
  text "PG_LED" at 2448.19,2121.87 h39.37
  text "-" at 39.54,2066.93 h60
  text "+" at 679.3,2057.09 h60
  text "-" at 777.73,2057.09 h60
  text "5" at 10971.21,1983.21 h88.77
  text "1" at 11012.49,1983.21 h88.77
  text "B" at 11301.32,1983.21 h88.77
  text "E" at 11358.96,1983.21 h88.77
  text "_" at 11408.41,1983.21 h88.77
  text "R" at 11449.69,1983.21 h88.77
  text "F" at 11507.33,1983.21 h88.77
  text "_" at 11556.78,1983.21 h88.77
  text "V" at 11598.06,1983.21 h88.77
  text "C" at 11655.7,1983.21 h88.77
  text "C" at 11713.33,1983.21 h88.77
  text "4" at 12047.33,1983.21 h88.77
  text "9" at 12088.6,1983.21 h88.77
  text "S" at 12393.97,1983.21 h88.77
  text "D" at 12443.42,1983.21 h88.77
  text "A" at 12501.06,1983.21 h88.77
  text "_" at 12558.69,1983.21 h88.77
  text "C" at 12599.97,1983.21 h88.77
  text "H" at 12657.61,1983.21 h88.77
  text "N" at 12715.63,1983.21 h88.77
  text "_" at 12773.26,1983.21 h88.77
  text "2" at 12814.54,1983.21 h88.77
  text "5" at 10971.21,1808.36 h88.77
  text "2" at 11012.49,1808.36 h88.77
  text "B" at 11301.32,1808.36 h88.77
  text "E" at 11358.96,1808.36 h88.77
  text "_" at 11408.41,1808.36 h88.77
  text "R" at 11449.69,1808.36 h88.77
  text "F" at 11507.33,1808.36 h88.77
  text "_" at 11556.78,1808.36 h88.77
  text "V" at 11598.06,1808.36 h88.77
  text "C" at 11655.7,1808.36 h88.77
  text "C" at 11713.33,1808.36 h88.77
  text "5" at 12047.33,1808.36 h88.77
  text "1" at 12088.6,1808.36 h88.77
  text "S" at 12398.29,1808.36 h88.77
  text "C" at 12447.75,1808.36 h88.77
  text "L" at 12505.39,1808.36 h88.77
  text "_" at 12554.84,1808.36 h88.77
  text "C" at 12596.12,1808.36 h88.77
  text "H" at 12653.76,1808.36 h88.77
  text "N" at 12711.39,1808.36 h88.77
  text "_" at 12769.41,1808.36 h88.77
  text "2" at 12810.3,1808.36 h88.77
  text "EXTRA I/O PINS" at 10098.43,1803.15 h60 r270
  text "I/O Voltage" at 2515.91,1498.5 h60
  text "NO DEVICE" at 37.4,1419.29 h72.83
  text "1V8" at 2570.12,1321.02 h60
  text "11" at 2939.29,1321.02 h60
  text "CHARGER ONLY" at 37.4,1301.18 h72.83
  text "2V5" at 2565.12,1163.54 h60
  text "10" at 2929.29,1163.54 h60
  text "3V3" at 2565.12,1006.06 h60
  text "01" at 2934.29,1006.06 h60
  text "Slot 6" at 10762.63,782.43 h118.11
  text "RBF" at 1350.39,625.2 h78.74
  text "CHARGE" at 1911.42,625.2 h78.74
  text "-" at 1220.47,386.55 h60
  text "+" at 1653.54,386.55 h60
  text "-" at 1899.61,386.55 h60
  text "+" at 2332.68,386.55 h60
  text "NC" at 2758.03,139.5 h60 r270
  text "CM" at 2876.14,139.5 h60 r270
  text "NO" at 2994.25,139.5 h60 r270
  text "NC" at 3395.83,139.5 h60 r270
  text "CM" at 3513.94,139.5 h60 r270
  text "NO" at 3632.05,139.5 h60 r270
  text "RS485" at 6919.29,31.5 h60
Mechanical 6:
  the board outline again, w10
Drill Drawing:
  drawing of 191 lines, arcs and shapes, not listed
  text "Symbol" at 18010.89,13042.72 h72
  text "Count" at 18516.76,13042.72 h72
  text "Hole Size" at 19176.58,13042.72 h72
  text "Plated" at 20326.25,13042.72 h72
  text "Hole Type" at 20832.12,13042.72 h72
  text "Drill Layer Pair" at 21565.92,13042.72 h72
  text "Via/Pad" at 23065.48,13042.72 h72
  text "Pad Shape" at 23655.32,13042.72 h72
  text "Template" at 24745.01,13042.72 h72
  text "Description" at 26464.49,13042.72 h72
  text "Hole Tolerance (+)" at 27318.25,13042.72 h72
  text "Hole Tolerance (-)" at 28651.86,13042.72 h72
  text "Hole Length" at 29985.47,13042.72 h72
  text "Routed Path Length" at 31085.14,13042.72 h72
  text "2" at 18516.76,12892.72 h60
  text "32.01mil (0.813mm)" at 19176.58,12892.72 h60
  text "NPTH" at 20326.25,12892.72 h60
  text "Round" at 20832.12,12892.72 h60
  text "Top Layer - Bottom Layer" at 21565.92,12892.72 h60
  text "Pad" at 23065.48,12892.72 h60
  text "Rounded" at 23655.32,12892.72 h60
  text "c76hn81" at 24745.01,12892.72 h60
  text "-" at 29985.47,12892.72 h60
  text "-" at 31085.14,12892.72 h60
  text "2" at 18516.76,12742.72 h60
  text "47.99mil (1.219mm)" at 19176.58,12742.72 h60
  text "NPTH" at 20326.25,12742.72 h60
  text "Round" at 20832.12,12742.72 h60
  text "Top Layer - Bottom Layer" at 21565.92,12742.72 h60
  text "Pad" at 23065.48,12742.72 h60
  text "Rounded" at 23655.32,12742.72 h60
  text "c117hn122" at 24745.01,12742.72 h60
  text "-" at 29985.47,12742.72 h60
  text "-" at 31085.14,12742.72 h60
  text "2" at 18516.76,12592.72 h60
  text "62.99mil (1.600mm)" at 19176.58,12592.72 h60
  text "PTH" at 20326.25,12592.72 h60
  text "Slot" at 20832.12,12592.72 h60
  text "Top Layer - Bottom Layer" at 21565.92,12592.72 h60
  text "Pad" at 23065.48,12592.72 h60
  text "Rounded Rectangle" at 23655.32,12592.72 h60
  text "r110_210h160_60r55m110_210p0" at 24745.01,12592.72 h60
  text "23.62mil (0.600mm)" at 29985.47,12592.72 h60
  text "-39.37mil (-1.000mm)" at 31085.14,12592.72 h60
  text "2" at 18516.76,12442.72 h60
  text "82.68mil (2.100mm)" at 19176.58,12442.72 h60
  text "PTH" at 20326.25,12442.72 h60
  text "Slot" at 20832.12,12442.72 h60
  text "Top Layer - Bottom Layer" at 21565.92,12442.72 h60
  text "Pad" at 23065.48,12442.72 h60
  text "Rounded Rectangle" at 23655.32,12442.72 h60
  text "r110_260h210_60r55m110_260p0" at 24745.01,12442.72 h60
  text "23.62mil (0.600mm)" at 29985.47,12442.72 h60
  text "-59.06mil (-1.500mm)" at 31085.14,12442.72 h60
  text "4" at 18516.76,12292.72 h60
  text "125.00mil (3.175mm)" at 19176.58,12292.72 h60
  text "PTH" at 20326.25,12292.72 h60
  text "Round" at 20832.12,12292.72 h60
  text "Top Layer - Bottom Layer" at 21565.92,12292.72 h60
  text "Pad" at 23065.48,12292.72 h60
  text "Rounded" at 23655.32,12292.72 h60
  text "c432h318" at 24745.01,12292.72 h60
  text "-" at 29985.47,12292.72 h60
  text "-" at 31085.14,12292.72 h60
  text "4" at 18516.76,12142.72 h60
  text "177.17mil (4.500mm)" at 19176.58,12142.72 h60
  text "PTH" at 20326.25,12142.72 h60
  text "Round" at 20832.12,12142.72 h60
  text "Top Layer - Bottom Layer" at 21565.92,12142.72 h60
  text "Pad" at 23065.48,12142.72 h60
  text "Rounded" at 23655.32,12142.72 h60
  text "c600h450" at 24745.01,12142.72 h60
  text "-" at 29985.47,12142.72 h60
  text "-" at 31085.14,12142.72 h60
  text "6" at 18516.76,11992.72 h60
  text "24.61mil (0.625mm)" at 19176.58,11992.72 h60
  text "PTH" at 20326.25,11992.72 h60
  text "Rectangle" at 20832.12,11992.72 h60
  text "Top Layer - Bottom Layer" at 21565.92,11992.72 h60
  text "Pad" at 23065.48,11992.72 h60
  text "Rectangle" at 23655.32,11992.72 h60
  text "r284_109h62_162_503323056" at 24745.01,11992.72 h60
  text "63.98mil (1.625mm)" at 29985.47,11992.72 h60
  text "63.98mil (1.625mm)" at 31085.14,11992.72 h60
  text "B" at 17981.8,11982.73 h66.67
  text "6" at 18516.76,11842.72 h60
  text "32.28mil (0.820mm)" at 19176.58,11842.72 h60
  text "PTH" at 20326.25,11842.72 h60
  text "Round" at 20832.12,11842.72 h60
  text "Top Layer - Bottom Layer" at 21565.92,11842.72 h60
  text "Pad" at 23065.48,11842.72 h60
  text "Rounded" at 23655.32,11842.72 h60
  text "c132h82" at 24745.01,11842.72 h60
  text "-" at 29985.47,11842.72 h60
  text "-" at 31085.14,11842.72 h60
  text "A" at 17981.8,11832.73 h66.67
  text "6" at 18516.76,11692.72 h60
  text "35.04mil (0.890mm)" at 19176.58,11692.72 h60
  text "PTH" at 20326.25,11692.72 h60
  text "Round" at 20832.12,11692.72 h60
  text "Top Layer - Bottom Layer" at 21565.92,11692.72 h60
  text "Pad" at 23065.48,11692.72 h60
  text "Rounded" at 23655.32,11692.72 h60
  text "c140h89" at 24745.01,11692.72 h60
  text "-" at 29985.47,11692.72 h60
  text "-" at 31085.14,11692.72 h60
  text "14" at 18516.76,11542.72 h60
  text "39.37mil (1.000mm)" at 19176.58,11542.72 h60
  text "PTH" at 20326.25,11542.72 h60
  text "Round" at 20832.12,11542.72 h60
  text "Top Layer - Bottom Layer" at 21565.92,11542.72 h60
  text "Pad" at 23065.48,11542.72 h60
  text "(Mixed)" at 23655.32,11542.72 h60
  text "(Mixed)" at 24745.01,11542.72 h60
  text "-" at 29985.47,11542.72 h60
  text "-" at 31085.14,11542.72 h60
  text "16" at 18516.76,11392.72 h60
  text "75.00mil (1.905mm)" at 19176.58,11392.72 h60
  text "PTH" at 20326.25,11392.72 h60
  text "Round" at 20832.12,11392.72 h60
  text "Top Layer - Bottom Layer" at 21565.92,11392.72 h60
  text "Pad" at 23065.48,11392.72 h60
  text "(Mixed)" at 23655.32,11392.72 h60
  text "(Mixed)" at 24745.01,11392.72 h60
  text "-" at 29985.47,11392.72 h60
  text "-" at 31085.14,11392.72 h60
  text "16" at 18516.76,11242.72 h60
  text "78.74mil (2.000mm)" at 19176.58,11242.72 h60
  text "PTH" at 20326.25,11242.72 h60
  text "Round" at 20832.12,11242.72 h60
  text "Top Layer - Bottom Layer" at 21565.92,11242.72 h60
  text "Pad" at 23065.48,11242.72 h60
  text "Rounded" at 23655.32,11242.72 h60
  text "c318h200" at 24745.01,11242.72 h60
  text "-" at 29985.47,11242.72 h60
  text "-" at 31085.14,11242.72 h60
  text "C" at 17981.8,11232.73 h66.67
  text "24" at 18516.76,11092.72 h60
  text "125.98mil (3.200mm)" at 19176.58,11092.72 h60
  text "PTH" at 20326.25,11092.72 h60
  text "Round" at 20832.12,11092.72 h60
  text "Top Layer - Bottom Layer" at 21565.92,11092.72 h60
  text "Pad" at 23065.48,11092.72 h60
  text "Rounded" at 23655.32,11092.72 h60
  text "(Mixed)" at 24745.01,11092.72 h60
  text "-" at 29985.47,11092.72 h60
  text "-" at 31085.14,11092.72 h60
  text "28" at 18516.76,10942.72 h60
  text "38.19mil (0.970mm)" at 19176.58,10942.72 h60
  text "PTH" at 20326.25,10942.72 h60
  text "Round" at 20832.12,10942.72 h60
  text "Top Layer - Bottom Layer" at 21565.92,10942.72 h60
  text "Pad" at 23065.48,10942.72 h60
  text "Rounded" at 23655.32,10942.72 h60
  text "c140h97" at 24745.01,10942.72 h60
  text "-" at 29985.47,10942.72 h60
  text "-" at 31085.14,10942.72 h60
  text "42" at 18516.76,10792.72 h60
  text "40.16mil (1.020mm)" at 19176.58,10792.72 h60
  text "PTH" at 20326.25,10792.72 h60
  text "Round" at 20832.12,10792.72 h60
  text "Top Layer - Bottom Layer" at 21565.92,10792.72 h60
  text "Pad" at 23065.48,10792.72 h60
  text "(Mixed)" at 23655.32,10792.72 h60
  text "(Mixed)" at 24745.01,10792.72 h60
  text "-" at 29985.47,10792.72 h60
  text "-" at 31085.14,10792.72 h60
  text "72" at 18516.76,10642.72 h60
  text "17.72mil (0.450mm)" at 19176.58,10642.72 h60
  text "PTH" at 20326.25,10642.72 h60
  text "Round" at 20832.12,10642.72 h60
  text "Top Layer - Bottom Layer" at 21565.92,10642.72 h60
  text "Via" at 23065.48,10642.72 h60
  text "Rounded" at 23655.32,10642.72 h60
  text "v76h45m0mx0" at 24745.01,10642.72 h60
  text "-" at 29985.47,10642.72 h60
  text "-" at 31085.14,10642.72 h60
  text "631" at 18516.76,10492.72 h60
  text "35.43mil (0.900mm)" at 19176.58,10492.72 h60
  text "PTH" at 20326.25,10492.72 h60
  text "Round" at 20832.12,10492.72 h60
  text "Top Layer - Bottom Layer" at 21565.92,10492.72 h60
  text "Pad" at 23065.48,10492.72 h60
  text "(Mixed)" at 23655.32,10492.72 h60
  text "(Mixed)" at 24745.01,10492.72 h60
  text "-" at 29985.47,10492.72 h60
  text "-" at 31085.14,10492.72 h60
  text "690" at 18516.76,10342.72 h60
  text "15.00mil (0.381mm)" at 19176.58,10342.72 h60
  text "PTH" at 20326.25,10342.72 h60
  text "Round" at 20832.12,10342.72 h60
  text "Top Layer - Bottom Layer" at 21565.92,10342.72 h60
  text "Via" at 23065.48,10342.72 h60
  text "Rounded" at 23655.32,10342.72 h60
  text "v76h38_2670034071" at 24745.01,10342.72 h60
  text "-" at 29985.47,10342.72 h60
  text "-" at 31085.14,10342.72 h60
  text "D" at 17981.8,10332.73 h66.67
  text "872" at 18516.76,10192.72 h60
  text "11.81mil (0.300mm)" at 19176.58,10192.72 h60
  text "PTH" at 20326.25,10192.72 h60
  text "Round" at 20832.12,10192.72 h60
  text "Top Layer - Bottom Layer" at 21565.92,10192.72 h60
  text "Via" at 23065.48,10192.72 h60
  text "Rounded" at 23655.32,10192.72 h60
  text "(Mixed)" at 24745.01,10192.72 h60
  text "-" at 29985.47,10192.72 h60
  text "-" at 31085.14,10192.72 h60
  text "2439 Total" at 18516.76,10042.72 h60
  text "Slot definitions :" at 18010.89,9897.75 h60
  text "Routed Path Length" at 19043.58,9897.75 h60
  text "= Calculated from tool start centre position to tool end centre position." at 20146.24,9897.75 h60
  text "Hole Length" at 19043.58,9797.77 h60
  text "= Routed Path Length + Tool Size = Slot length as defined in the PCB layout" at 19736.37,9797.77 h60

## Text inside footprints (layer, text, board x,y; h text height)
CN3: Bottom Overlay "1" at 2249.02,204.72 h39.37
CN4: Bottom Overlay "1" at 3070.87,211.61 h39.37
CN5: Bottom Overlay "1" at 3751.97,212.6 h39.37
CN6: Bottom Overlay "1" at 1569.88,204.72 h39.37
CN20: Mechanical 15 "PC104" at 364.17,5501.97 h39.37 r90; Top Overlay "2" at 366.18,4840.12 h29.53 r90; Top Overlay "1" at 266.18,4850.12 h29.53 r90; Top Overlay "1" at 461.18,4850.12 h29.53 r90; Top Overlay "2" at 651.18,4920.12 h29.53 r90; Top Overlay "52" at 651.18,7405.12 h29.53 r90; Top Overlay "51" at 461.18,7510.12 h29.53 r90; Top Overlay "52" at 366.18,7510.12 h29.53 r90; Top Overlay "51" at 266.18,7510.12 h29.53 r90; Top Overlay "50" at 651.18,7305.12 h29.53 r90; Top Overlay "48" at 651.18,7200.12 h29.53 r90; Top Overlay "46" at 651.18,7105.12 h29.53 r90; Top Overlay "44" at 651.18,7005.12 h29.53 r90; Top Overlay "42" at 651.18,6905.12 h29.53 r90; Top Overlay "40" at 651.18,6805.12 h29.53 r90; Top Overlay "38" at 651.18,6705.12 h29.53 r90; Top Overlay "36" at 651.18,6605.12 h29.53 r90; Top Overlay "34" at 651.18,6505.12 h29.53 r90; Top Overlay "32" at 651.18,6405.12 h29.53 r90; Top Overlay "30" at 651.18,6305.12 h29.53 r90; Top Overlay "28" at 651.18,6205.12 h29.53 r90; Top Overlay "26" at 651.18,6105.12 h29.53 r90; Top Overlay "24" at 651.18,6005.12 h29.53 r90; Top Overlay "22" at 651.18,5905.12 h29.53 r90; Top Overlay "20" at 651.18,5805.12 h29.53 r90; Top Overlay "18" at 651.18,5705.12 h29.53 r90; Top Overlay "16" at 651.18,5605.12 h29.53 r90; Top Overlay "14" at 651.18,5505.12 h29.53 r90; Top Overlay "12" at 651.18,5405.12 h29.53 r90; Top Overlay "10" at 651.18,5305.12 h29.53 r90; Top Overlay "8" at 651.18,5220.12 h29.53 r90; Top Overlay "6" at 651.18,5120.12 h29.53 r90; Top Overlay "4" at 651.18,5020.12 h29.53 r90; Top Overlay "49" at 181.18,7300.12 h29.53 r90; Top Overlay "47" at 181.18,7205.12 h29.53 r90; Top Overlay "45" at 181.18,7105.12 h29.53 r90; Top Overlay "43" at 181.18,7005.12 h29.53 r90; Top Overlay "41" at 181.18,6905.12 h29.53 r90; Top Overlay "39" at 181.18,6805.12 h29.53 r90; Top Overlay "37" at 181.18,6705.12 h29.53 r90; Top Overlay "35" at 181.18,6605.12 h29.53 r90; Top Overlay "33" at 181.18,6505.12 h29.53 r90; Top Overlay "31" at 181.18,6405.12 h29.53 r90; Top Overlay "29" at 181.18,6305.12 h29.53 r90; Top Overlay "27" at 181.18,6205.12 h29.53 r90; Top Overlay "25" at 181.18,6105.12 h29.53 r90; Top Overlay "23" at 181.18,6005.12 h29.53 r90; Top Overlay "21" at 181.18,5905.12 h29.53 r90; Top Overlay "19" at 181.18,5805.12 h29.53 r90; Top Overlay "17" at 181.18,5705.12 h29.53 r90; Top Overlay "15" at 181.18,5605.12 h29.53 r90; Top Overlay "13" at 181.18,5505.12 h29.53 r90; Top Overlay "11" at 181.18,5405.12 h29.53 r90; Top Overlay "9" at 181.18,5320.12 h29.53 r90; Top Overlay "7" at 181.18,5220.12 h29.53 r90; Top Overlay "5" at 181.18,5120.12 h29.53 r90; Top Overlay "3" at 181.18,5020.12 h29.53 r90; Top Overlay "H1" at 386.18,4615.12 h29.53 r90; Top Overlay "H2" at 446.18,4615.12 h29.53 r90
CN21: Top Overlay "3" at 9015,9658.19 h29.53; Top Overlay "5" at 8915,9658.19 h29.53; Top Overlay "7" at 8820,9658.19 h29.53; Top Overlay "9" at 8715,9658.19 h29.53; Top Overlay "11" at 8610,9658.19 h29.53; Top Overlay "13" at 8505,9658.19 h29.53; Top Overlay "15" at 8405,9658.19 h29.53; Top Overlay "17" at 8310,9658.19 h29.53; Top Overlay "19" at 8205,9658.19 h29.53; Top Overlay "21" at 8110,9658.19 h29.53; Top Overlay "23" at 8005,9658.19 h29.53; Top Overlay "25" at 7905,9658.19 h29.53; Top Overlay "27" at 7805,9658.19 h29.53; Top Overlay "29" at 7705,9658.19 h29.53; Top Overlay "31" at 7605,9658.19 h29.53; Top Overlay "33" at 7505,9658.19 h29.53; Top Overlay "35" at 7400,9658.19 h29.53; Top Overlay "37" at 7310,9658.19 h29.53; Top Overlay "39" at 7205,9658.19 h29.53; Top Overlay "41" at 7105,9658.19 h29.53; Top Overlay "43" at 7000,9658.19 h29.53; Top Overlay "45" at 6900,9658.19 h29.53; Top Overlay "47" at 6805,9658.19 h29.53; Top Overlay "49" at 6700,9658.19 h29.53; Top Overlay "4" at 9015,9188.19 h29.53; Top Overlay "6" at 8915,9188.19 h29.53; Top Overlay "8" at 8815,9188.19 h29.53; Top Overlay "10" at 8700,9188.19 h29.53; Top Overlay "12" at 8600,9188.19 h29.53; Top Overlay "14" at 8500,9188.19 h29.53; Top Overlay "16" at 8400,9188.19 h29.53; Top Overlay "18" at 8300,9188.19 h29.53; Top Overlay "20" at 8200,9188.19 h29.53; Top Overlay "22" at 8100,9188.19 h29.53; Top Overlay "24" at 8000,9188.19 h29.53; Top Overlay "26" at 7905,9188.19 h29.53; Top Overlay "28" at 7800,9188.19 h29.53; Top Overlay "30" at 7700,9188.19 h29.53; Top Overlay "32" at 7600,9188.19 h29.53; Top Overlay "34" at 7500,9188.19 h29.53; Top Overlay "36" at 7400,9188.19 h29.53; Top Overlay "38" at 7300,9188.19 h29.53; Top Overlay "40" at 7200,9188.19 h29.53; Top Overlay "42" at 7100,9188.19 h29.53; Top Overlay "44" at 7000,9188.19 h29.53; Top Overlay "46" at 6900,9188.19 h29.53; Top Overlay "48" at 6800,9188.19 h29.53; Top Overlay "50" at 6700,9188.19 h29.53; Top Overlay "51" at 6505,9573.19 h29.53; Top Overlay "52" at 6495,9473.19 h29.53; Top Overlay "51" at 6505,9373.19 h29.53; Top Overlay "52" at 6600,9188.19 h29.53; Top Overlay "2" at 9120,9188.19 h29.53; Top Overlay "1" at 9195,9378.19 h29.53; Top Overlay "1" at 9195,9573.19 h29.53; Top Overlay "2" at 9195,9473.19 h29.53; Top Overlay "H2" at 6300,9393.19 h29.53; Top Overlay "H1" at 6300,9453.19 h29.53